# Altium PCB Trigger.PcbDoc (part 1 of 3)
Units mil, origin at the board's own origin, x right, y up, seen from the top; angles counter-clockwise.
Board outline 9937 x 6299 mil, 4 copper layers (TopLayer, MidLayer1, MidLayer2, BottomLayer); 197 components, 279 nets, 1978 pads, 340 vias.
Unrouted connection lines stored in the file: 59.
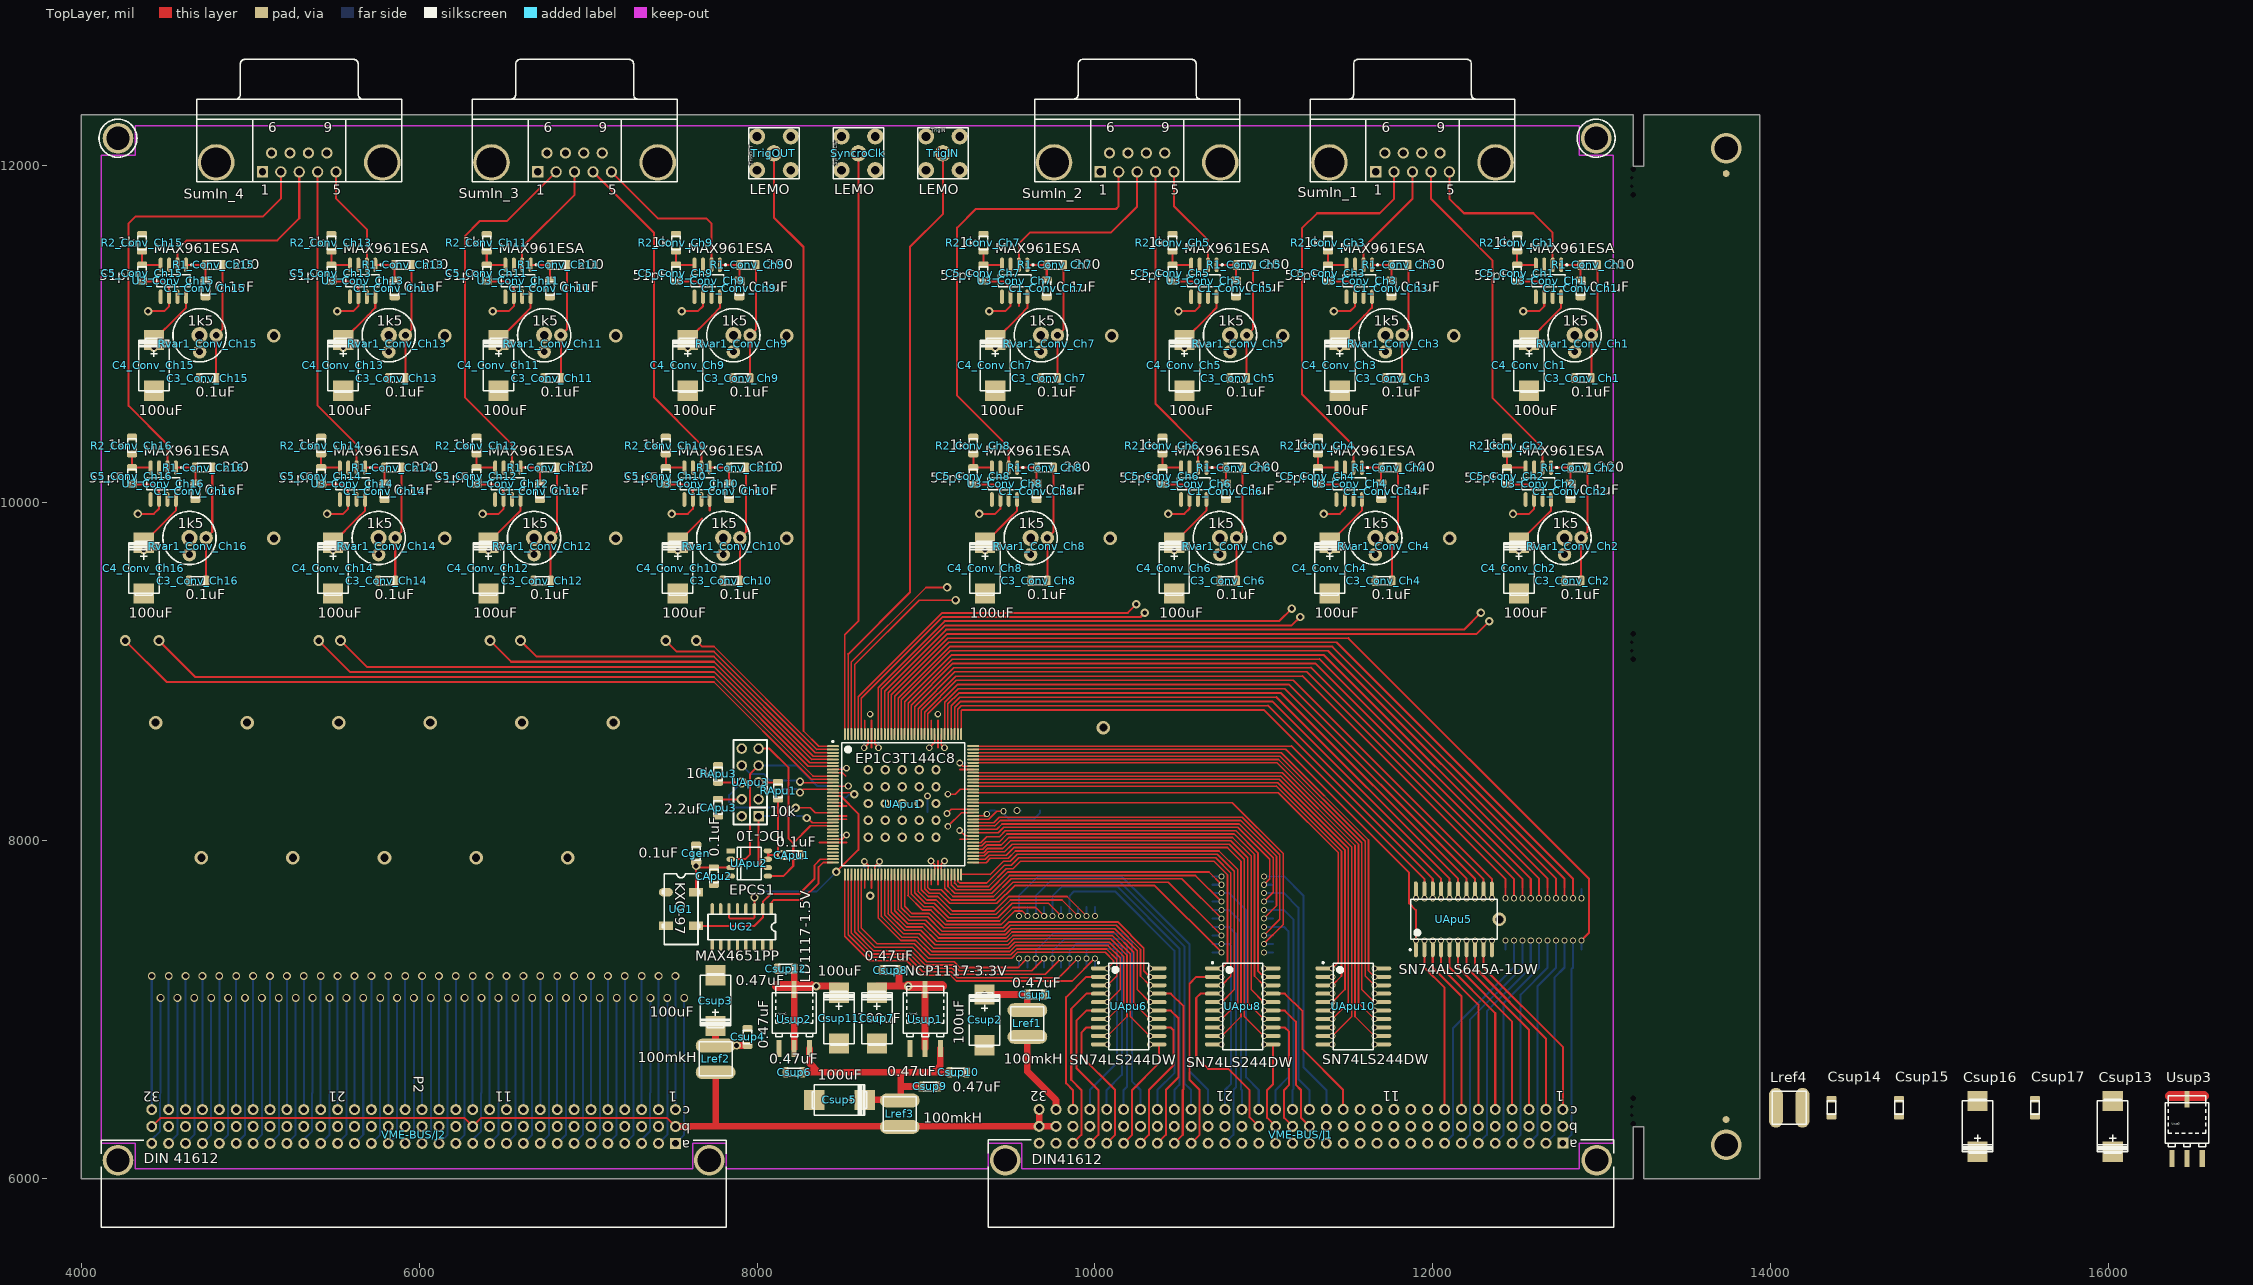
[diagram p0: TopLayer view]
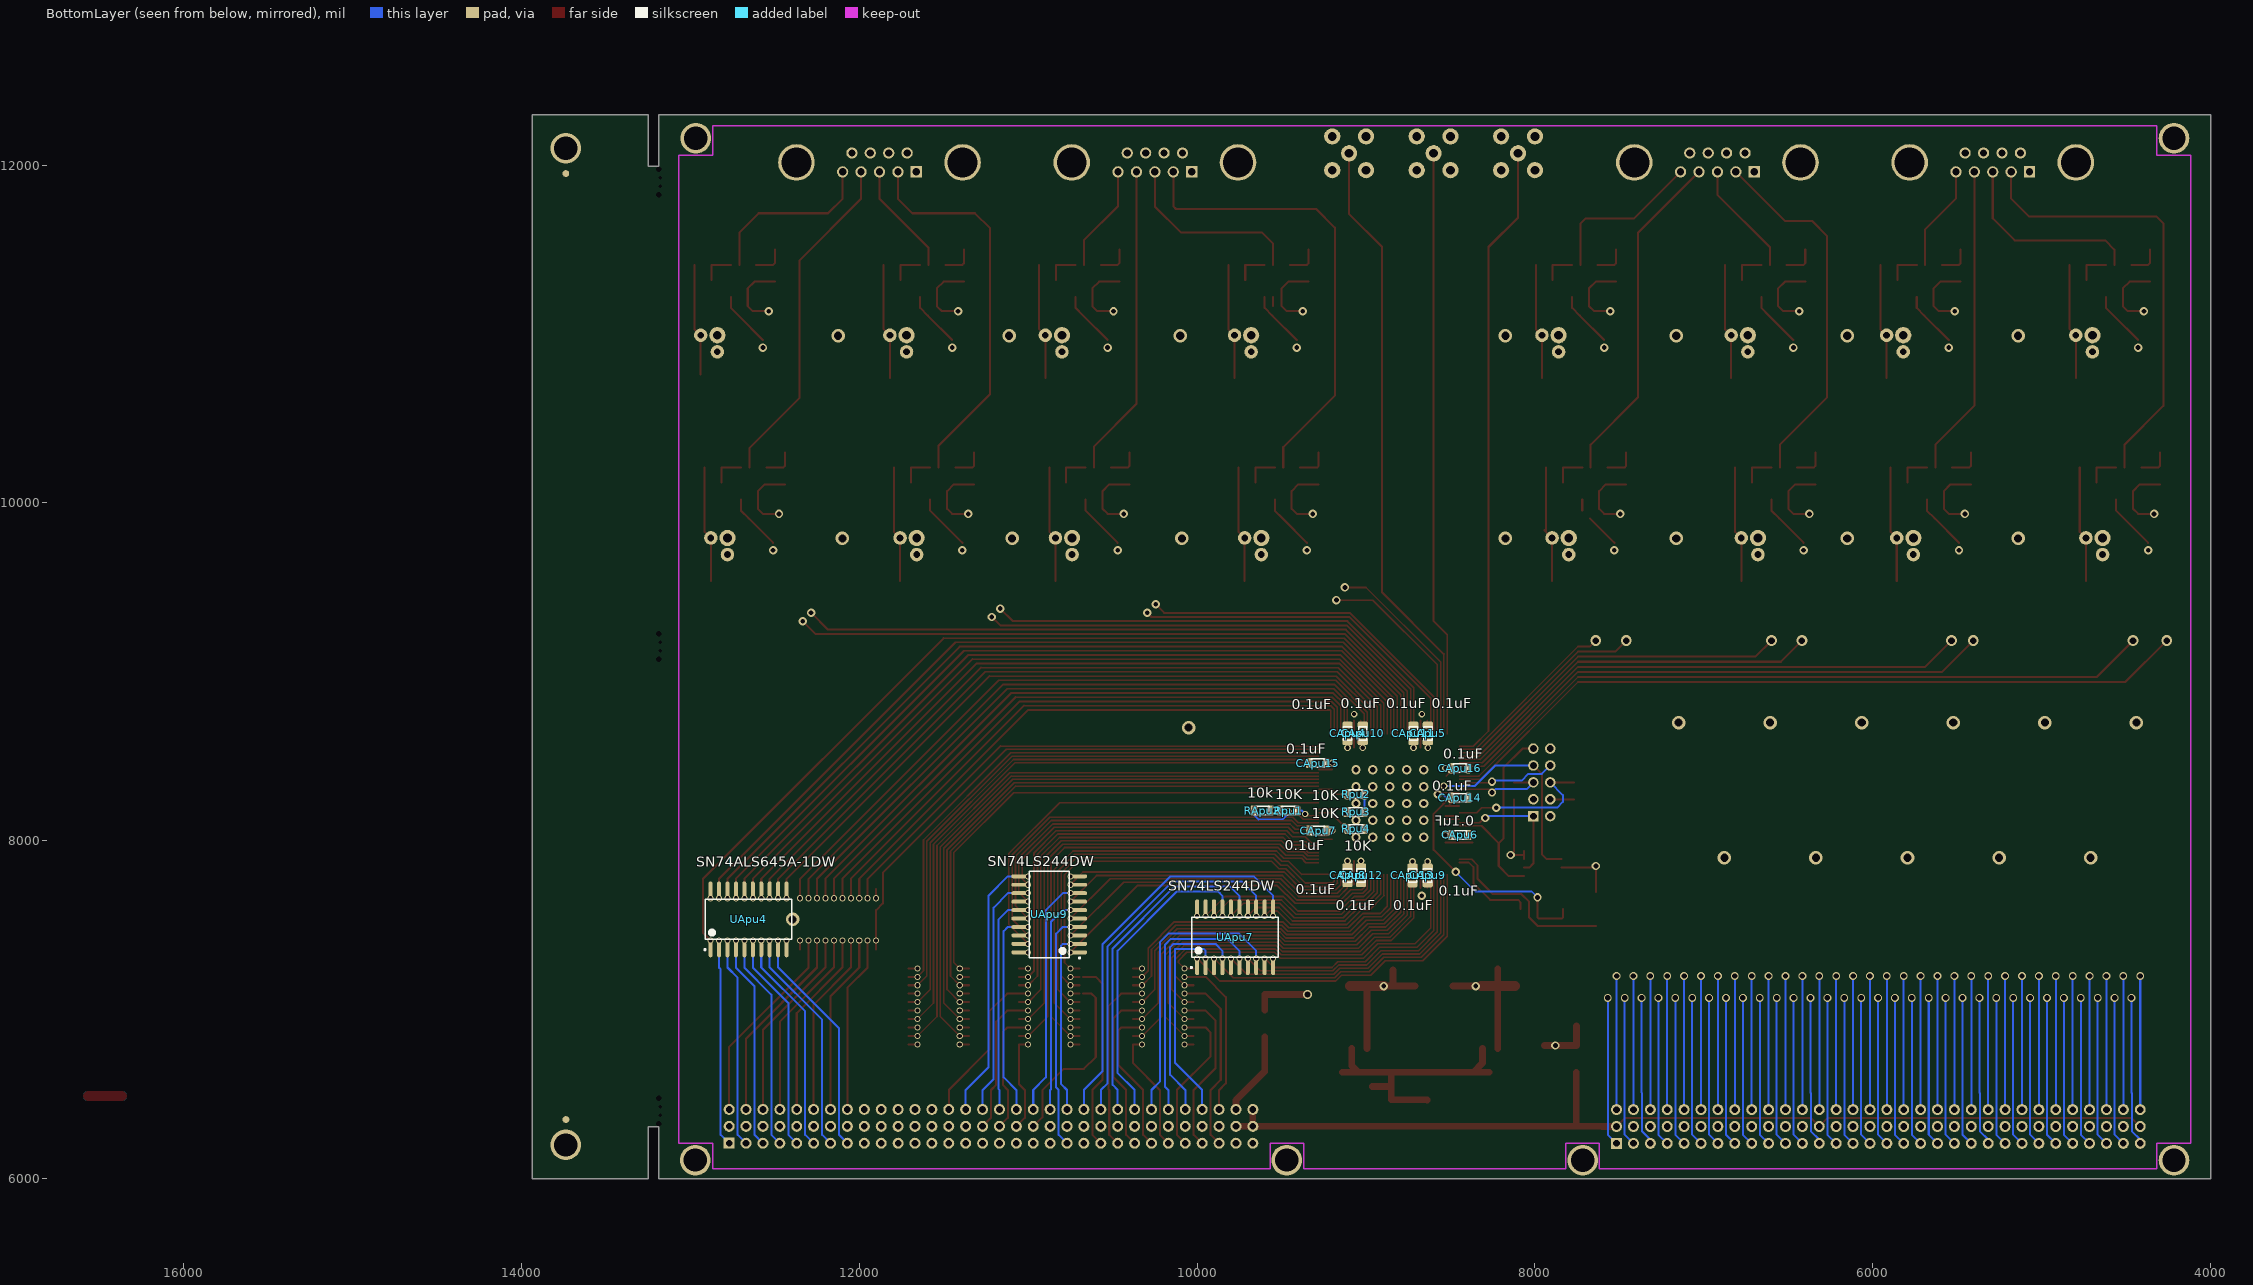
[diagram p1: BottomLayer view, seen from below]
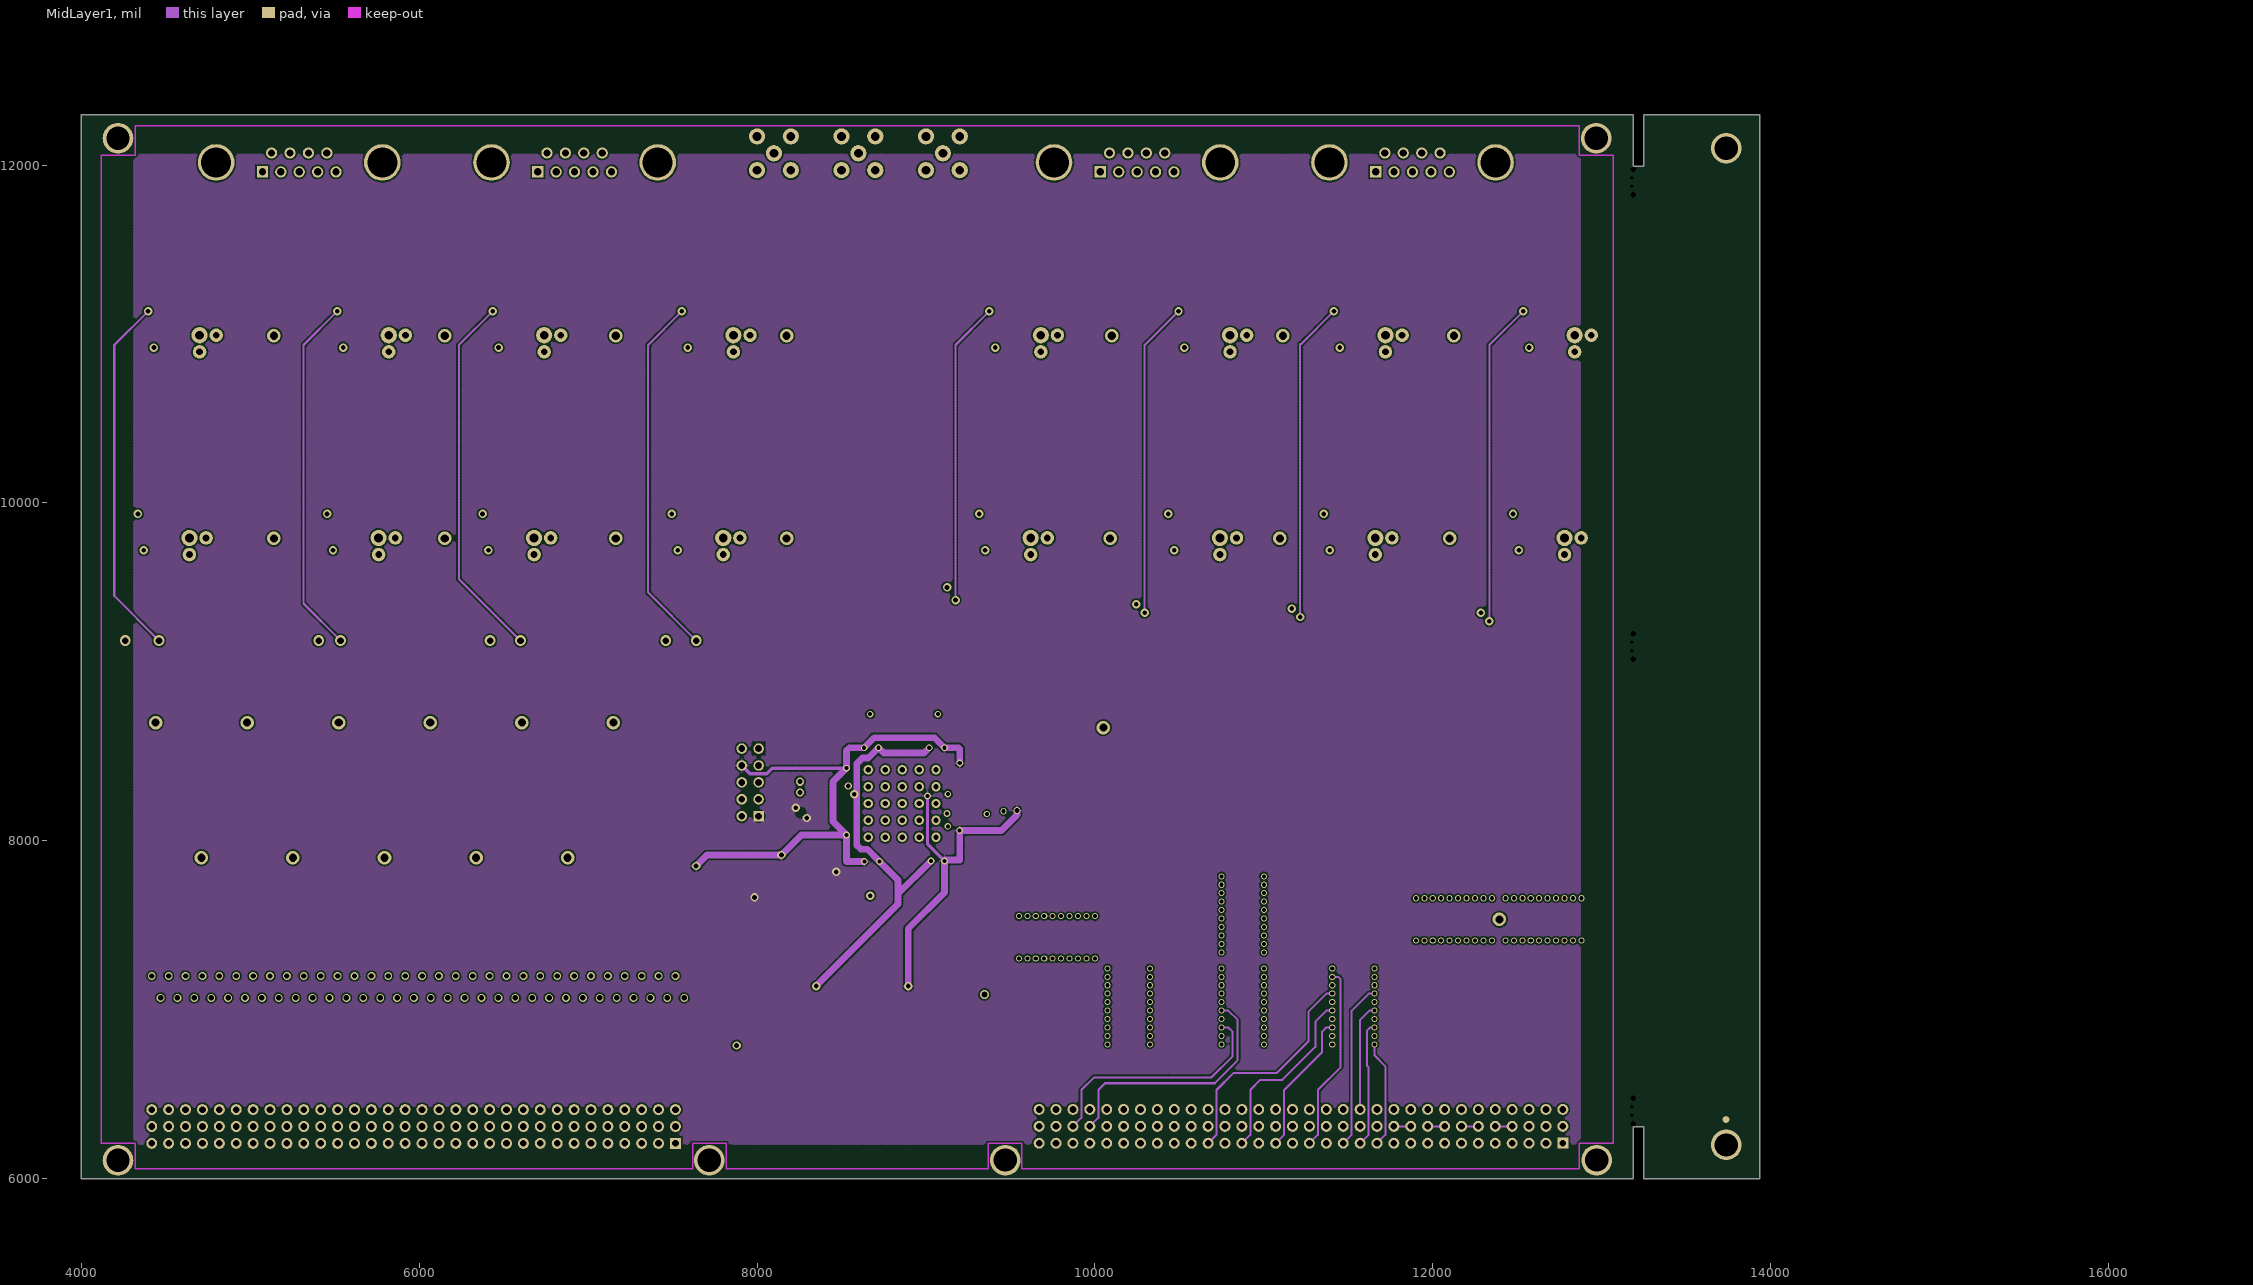
[diagram p2: MidLayer1]
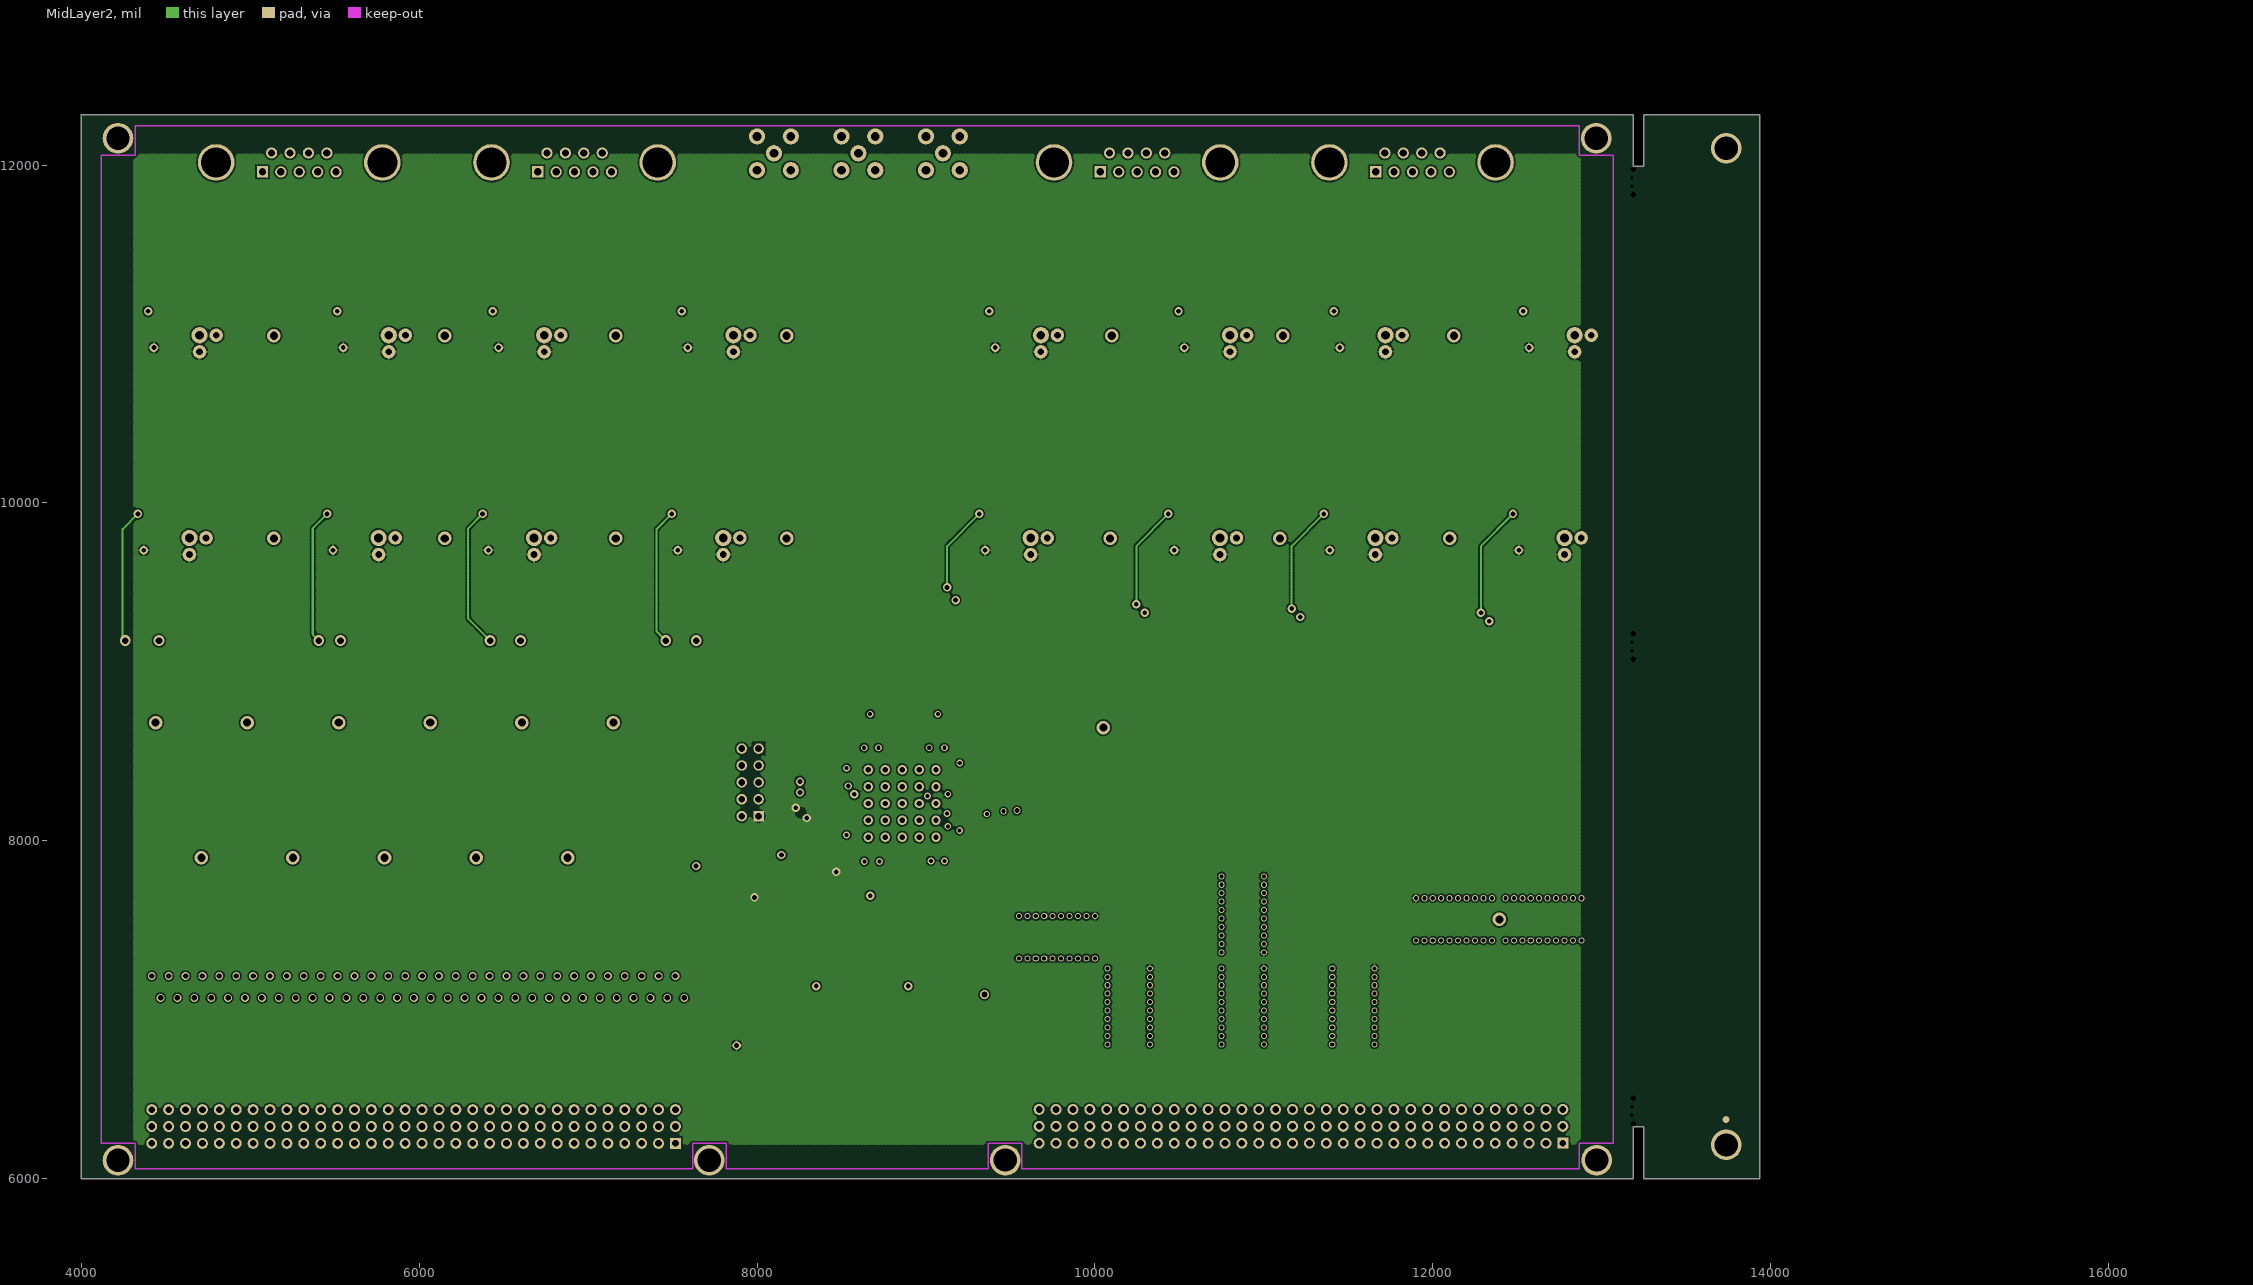
[diagram p3: MidLayer2]

## Layer stack, top to bottom
TopLayer: signal copper 1.4
Dielectric: core 12.6, FR-4, Dk 4.8
MidLayer1: signal copper 1.4
Dielectric: prepreg 12.6, FR-4, Dk 4.8
MidLayer2: signal copper 1.4
Dielectric: core 12.6, FR-4, Dk 4.8
BottomLayer: signal copper 1.4

## Board outline
4000,6000 13187,6000 13187,6307 13249,6307 13249,6000 13937,6000 13937,12299 13249,12299 13249,11993 13187,11993 13187,12299 4000,12299

## Design rules (kind name [scope] priority, off if disabled: settings)
Clearance [All] p1: gap=10
FabricationTestPointUsage TestPointUsage [All] p1: valid=0 allowmultiple=FALSE
FabricationTestpoint Testpoint [All] p1: side=3 testpointundercomponent=TRUE minsize=40 maxsize=100 preferedsize=60 minholesize=20 maxholesize=40 preferedholesize=32 testpointgrid=1 allowsidetop=TRUE allowsidebottom=TRUE usegrid=TRUE gridtolerance=0.01
PlaneClearance [All] p1: clearance=10
PolygonConnect [All] p1: connectstyle=Relief reliefconductorwidth=10 reliefentries=4 polygonreliefangle="90 Angle"
RoomDefinition Processing [InComponentClass('Processing')] p1: confinementstyle=ConfineIn formatcopy=TRUE lockcomponents=FALSE outline 3910,2715 4750,2715 4750,3570 3910,3570
RoomDefinition Conv_Ch16 [InComponentClass('Conv_Ch16')] p2: confinementstyle=ConfineIn formatcopy=TRUE lockcomponents=FALSE outline 5310,2715 5310,3905 4750,3905 4750,2715
RoomDefinition Conv_Ch15 [InComponentClass('Conv_Ch15')] p3: confinementstyle=ConfineIn formatcopy=TRUE lockcomponents=FALSE outline 5870,3905 5870,5095 5310,5095 5310,3905
RoomDefinition Conv_Ch14 [InComponentClass('Conv_Ch14')] p4: confinementstyle=ConfineIn formatcopy=TRUE lockcomponents=FALSE outline 6430,2715 6430,3905 5870,3905 5870,2715
RoomDefinition Conv_Ch13 [InComponentClass('Conv_Ch13')] p5: confinementstyle=ConfineIn formatcopy=TRUE lockcomponents=FALSE outline 6990,3905 6990,5095 6430,5095 6430,3905
RoomDefinition Conv_Ch12 [InComponentClass('Conv_Ch12')] p6: confinementstyle=ConfineIn formatcopy=TRUE lockcomponents=FALSE outline 7550,2715 7550,3905 6990,3905 6990,2715
RoomDefinition Conv_Ch11 [InComponentClass('Conv_Ch11')] p7: confinementstyle=ConfineIn formatcopy=TRUE lockcomponents=FALSE outline 8110,3905 8110,5095 7550,5095 7550,3905
RoomDefinition Conv_Ch10 [InComponentClass('Conv_Ch10')] p8: confinementstyle=ConfineIn formatcopy=TRUE lockcomponents=FALSE outline 8670,2715 8670,3905 8110,3905 8110,2715
RoomDefinition Conv_Ch9 [InComponentClass('Conv_Ch9')] p9: confinementstyle=ConfineIn formatcopy=TRUE lockcomponents=FALSE outline 9230,3905 9230,5095 8670,5095 8670,3905
RoomDefinition Conv_Ch8 [InComponentClass('Conv_Ch8')] p10: confinementstyle=ConfineIn formatcopy=TRUE lockcomponents=FALSE outline 9790,2715 9790,3905 9230,3905 9230,2715
RoomDefinition Conv_Ch7 [InComponentClass('Conv_Ch7')] p11: confinementstyle=ConfineIn formatcopy=TRUE lockcomponents=FALSE outline 10350,3905 10350,5095 9790,5095 9790,3905
RoomDefinition Conv_Ch6 [InComponentClass('Conv_Ch6')] p12: confinementstyle=ConfineIn formatcopy=TRUE lockcomponents=FALSE outline 10910,2715 10910,3905 10350,3905 10350,2715
RoomDefinition Conv_Ch5 [InComponentClass('Conv_Ch5')] p13: confinementstyle=ConfineIn formatcopy=TRUE lockcomponents=FALSE outline 11470,3905 11470,5095 10910,5095 10910,3905
RoomDefinition Conv_Ch4 [InComponentClass('Conv_Ch4')] p14: confinementstyle=ConfineIn formatcopy=TRUE lockcomponents=FALSE outline 12030,2715 12030,3905 11470,3905 11470,2715
RoomDefinition Conv_Ch3 [InComponentClass('Conv_Ch3')] p15: confinementstyle=ConfineIn formatcopy=TRUE lockcomponents=FALSE outline 12590,3905 12590,5095 12030,5095 12030,3905
RoomDefinition Conv_Ch2 [InComponentClass('Conv_Ch2')] p16: confinementstyle=ConfineIn formatcopy=TRUE lockcomponents=FALSE outline 13150,2715 13150,3905 12590,3905 12590,2715
RoomDefinition Conv_Ch1 [InComponentClass('Conv_Ch1')] p17: confinementstyle=ConfineIn formatcopy=TRUE lockcomponents=FALSE outline 13710,3905 13710,5095 13150,5095 13150,3905
RoomDefinition In-Out [InComponentClass('In-Out')] p18: confinementstyle=ConfineIn formatcopy=TRUE lockcomponents=FALSE outline 3910,3570 4755,3570 4755,4130 3910,4130
RoomDefinition Ref_Supply [InComponentClass('Ref_Supply')] p19: confinementstyle=ConfineIn formatcopy=TRUE lockcomponents=FALSE outline 3910,4130 4755,4130 4755,4705 3910,4705
RoutingVias [All] p1: holewidth=28 width=50 viastyle="Through Hole" minholewidth=28 minwidth=50 maxholewidth=28 maxwidth=50
SilkscreenOverComponentPads [All] p1: minsilkscreentomaskgap=10
SolderMaskExpansion SolderMaskExpansion_1 [HasPad('Free-2')] p1: expansion=20
SolderMaskExpansion [HasPad('Free-1')] p2: expansion=20
SolderMaskExpansion SolderMaskExpansion_2 [All] p3: expansion=2
Width [All] p1: maxlimit=60 minlimit=8 preferedwidth=12
24 further rules are at their usual default settings.

## Classes and differential pairs
component class Ref_Supply: Csup1 Csup2 Csup3 Csup4 Csup5 Csup6 Csup7 Csup8 Csup9 Csup10 Csup11 Csup12 Csup13 Csup14 Csup15 Csup16 Csup17 Lref1 Lref2 Lref3 Lref4 Usup1 Usup2 Usup3
channel class Ch_trig: Conv_Ch1 Conv_Ch2 Conv_Ch3 Conv_Ch4 Conv_Ch5 Conv_Ch6 Conv_Ch7 Conv_Ch8 Conv_Ch9 Conv_Ch10 Conv_Ch11 Conv_Ch12 Conv_Ch13 Conv_Ch14 Conv_Ch15 Conv_Ch16
component class In-Out: SumIn_1 SumIn_2 SumIn_3 SumIn_4 SyncroClk TrigIN TrigOUT VME-BUS/J1 VME-BUS/J2
component class Conv_Ch16: C1_Conv_Ch16 C3_Conv_Ch16 C4_Conv_Ch16 C5_Conv_Ch16 R1_Conv_Ch16 R2_Conv_Ch16 Rvar1_Conv_Ch16 U3_Conv_Ch16
component class Conv_Ch15: C1_Conv_Ch15 C3_Conv_Ch15 C4_Conv_Ch15 C5_Conv_Ch15 R1_Conv_Ch15 R2_Conv_Ch15 Rvar1_Conv_Ch15 U3_Conv_Ch15
component class Conv_Ch14: C1_Conv_Ch14 C3_Conv_Ch14 C4_Conv_Ch14 C5_Conv_Ch14 R1_Conv_Ch14 R2_Conv_Ch14 Rvar1_Conv_Ch14 U3_Conv_Ch14
component class Conv_Ch13: C1_Conv_Ch13 C3_Conv_Ch13 C4_Conv_Ch13 C5_Conv_Ch13 R1_Conv_Ch13 R2_Conv_Ch13 Rvar1_Conv_Ch13 U3_Conv_Ch13
component class Conv_Ch12: C1_Conv_Ch12 C3_Conv_Ch12 C4_Conv_Ch12 C5_Conv_Ch12 R1_Conv_Ch12 R2_Conv_Ch12 Rvar1_Conv_Ch12 U3_Conv_Ch12
component class Conv_Ch11: C1_Conv_Ch11 C3_Conv_Ch11 C4_Conv_Ch11 C5_Conv_Ch11 R1_Conv_Ch11 R2_Conv_Ch11 Rvar1_Conv_Ch11 U3_Conv_Ch11
component class Conv_Ch10: C1_Conv_Ch10 C3_Conv_Ch10 C4_Conv_Ch10 C5_Conv_Ch10 R1_Conv_Ch10 R2_Conv_Ch10 Rvar1_Conv_Ch10 U3_Conv_Ch10
component class Conv_Ch9: C1_Conv_Ch9 C3_Conv_Ch9 C4_Conv_Ch9 C5_Conv_Ch9 R1_Conv_Ch9 R2_Conv_Ch9 Rvar1_Conv_Ch9 U3_Conv_Ch9
component class Conv_Ch8: C1_Conv_Ch8 C3_Conv_Ch8 C4_Conv_Ch8 C5_Conv_Ch8 R1_Conv_Ch8 R2_Conv_Ch8 Rvar1_Conv_Ch8 U3_Conv_Ch8
component class Conv_Ch7: C1_Conv_Ch7 C3_Conv_Ch7 C4_Conv_Ch7 C5_Conv_Ch7 R1_Conv_Ch7 R2_Conv_Ch7 Rvar1_Conv_Ch7 U3_Conv_Ch7
component class Conv_Ch6: C1_Conv_Ch6 C3_Conv_Ch6 C4_Conv_Ch6 C5_Conv_Ch6 R1_Conv_Ch6 R2_Conv_Ch6 Rvar1_Conv_Ch6 U3_Conv_Ch6
component class Conv_Ch5: C1_Conv_Ch5 C3_Conv_Ch5 C4_Conv_Ch5 C5_Conv_Ch5 R1_Conv_Ch5 R2_Conv_Ch5 Rvar1_Conv_Ch5 U3_Conv_Ch5
component class Conv_Ch4: C1_Conv_Ch4 C3_Conv_Ch4 C4_Conv_Ch4 C5_Conv_Ch4 R1_Conv_Ch4 R2_Conv_Ch4 Rvar1_Conv_Ch4 U3_Conv_Ch4
component class Conv_Ch3: C1_Conv_Ch3 C3_Conv_Ch3 C4_Conv_Ch3 C5_Conv_Ch3 R1_Conv_Ch3 R2_Conv_Ch3 Rvar1_Conv_Ch3 U3_Conv_Ch3
component class Conv_Ch2: C1_Conv_Ch2 C3_Conv_Ch2 C4_Conv_Ch2 C5_Conv_Ch2 R1_Conv_Ch2 R2_Conv_Ch2 Rvar1_Conv_Ch2 U3_Conv_Ch2
component class Conv_Ch1: C1_Conv_Ch1 C3_Conv_Ch1 C4_Conv_Ch1 C5_Conv_Ch1 R1_Conv_Ch1 R2_Conv_Ch1 Rvar1_Conv_Ch1 U3_Conv_Ch1
component class Processing: CApu1 CApu2 CApu3 CApu4 CApu5 CApu6 CApu7 CApu8 CApu9 CApu10 CApu11 CApu12 CApu13 CApu14 CApu15 CApu16 Cgen RApu1 RApu2 RApu3 Rpu1 Rpu2 Rpu3 Rpu4 UApu1 UApu2 UApu3 UApu4 UApu5 UApu6 UApu7 UApu8 UApu9 UApu10 UG1 UG2

## Components (designator, comment, footprint, x,y, rotation, side; value= is the part's Value field where it differs from the comment)
C1_Conv_Ch1 "0.1uF" chip0805 12875,11220 r90 top (schematic designator C1)
C1_Conv_Ch2 "0.1uF" chip0805 12815,10020 r90 top (schematic designator C1)
C1_Conv_Ch3 "0.1uF" chip0805 11755,11220 r90 top (schematic designator C1)
C1_Conv_Ch4 "0.1uF" chip0805 11695,10020 r90 top (schematic designator C1)
C1_Conv_Ch5 "0.1uF" chip0805 10835,11220 r90 top (schematic designator C1)
C1_Conv_Ch6 "0.1uF" chip0805 10775,10020 r90 top (schematic designator C1)
C1_Conv_Ch7 "0.1uF" chip0805 9715,11220 r90 top (schematic designator C1)
C1_Conv_Ch8 "0.1uF" chip0805 9655,10020 r90 top (schematic designator C1)
C1_Conv_Ch9 "0.1uF" chip0805 7895,11220 r90 top (schematic designator C1)
C1_Conv_Ch10 "0.1uF" chip0805 7835,10020 r90 top (schematic designator C1)
C1_Conv_Ch11 "0.1uF" chip0805 6775,11220 r90 top (schematic designator C1)
C1_Conv_Ch12 "0.1uF" chip0805 6715,10020 r90 top (schematic designator C1)
C1_Conv_Ch13 "0.1uF" chip0805 5855,11220 r90 top (schematic designator C1)
C1_Conv_Ch14 "0.1uF" chip0805 5795,10020 r90 top (schematic designator C1)
C1_Conv_Ch15 "0.1uF" chip0805 4735,11220 r90 top (schematic designator C1)
C1_Conv_Ch16 "0.1uF" chip0805 4675,10020 r90 top (schematic designator C1)
C3_Conv_Ch1 "0.1uF" chip0805 12838.43,10739.45 r0 top (schematic designator C3)
C3_Conv_Ch2 "0.1uF" chip0805 12778.43,9539.45 r0 top (schematic designator C3)
C3_Conv_Ch3 "0.1uF" chip0805 11718.43,10739.45 r0 top (schematic designator C3)
C3_Conv_Ch4 "0.1uF" chip0805 11658.43,9539.45 r0 top (schematic designator C3)
C3_Conv_Ch5 "0.1uF" chip0805 10798.43,10739.45 r0 top (schematic designator C3)
C3_Conv_Ch6 "0.1uF" chip0805 10738.43,9539.45 r0 top (schematic designator C3)
C3_Conv_Ch7 "0.1uF" chip0805 9678.43,10739.45 r0 top (schematic designator C3)
C3_Conv_Ch8 "0.1uF" chip0805 9618.43,9539.45 r0 top (schematic designator C3)
C3_Conv_Ch9 "0.1uF" chip0805 7858.43,10739.45 r0 top (schematic designator C3)
C3_Conv_Ch10 "0.1uF" chip0805 7798.43,9539.45 r0 top (schematic designator C3)
C3_Conv_Ch11 "0.1uF" chip0805 6738.43,10739.45 r0 top (schematic designator C3)
C3_Conv_Ch12 "0.1uF" chip0805 6678.43,9539.45 r0 top (schematic designator C3)
C3_Conv_Ch13 "0.1uF" chip0805 5818.43,10739.45 r0 top (schematic designator C3)
C3_Conv_Ch14 "0.1uF" chip0805 5758.43,9539.45 r0 top (schematic designator C3)
C3_Conv_Ch15 "0.1uF" chip0805 4698.43,10739.45 r0 top (schematic designator C3)
C3_Conv_Ch16 "0.1uF" chip0805 4638.43,9539.45 r0 top (schematic designator C3)
C4_Conv_Ch1 "100uF" CEL-SMD300 12570,10964.49 r270 top (schematic designator C4)
C4_Conv_Ch2 "100uF" CEL-SMD300 12510,9764.49 r270 top (schematic designator C4)
C4_Conv_Ch3 "100uF" CEL-SMD300 11450,10964.49 r270 top (schematic designator C4)
C4_Conv_Ch4 "100uF" CEL-SMD300 11390,9764.49 r270 top (schematic designator C4)
C4_Conv_Ch5 "100uF" CEL-SMD300 10530,10964.49 r270 top (schematic designator C4)
C4_Conv_Ch6 "100uF" CEL-SMD300 10470,9764.49 r270 top (schematic designator C4)
C4_Conv_Ch7 "100uF" CEL-SMD300 9410,10964.49 r270 top (schematic designator C4)
C4_Conv_Ch8 "100uF" CEL-SMD300 9350,9764.49 r270 top (schematic designator C4)
C4_Conv_Ch9 "100uF" CEL-SMD300 7590,10964.49 r270 top (schematic designator C4)
C4_Conv_Ch10 "100uF" CEL-SMD300 7530,9764.49 r270 top (schematic designator C4)
C4_Conv_Ch11 "100uF" CEL-SMD300 6470,10964.49 r270 top (schematic designator C4)
C4_Conv_Ch12 "100uF" CEL-SMD300 6410,9764.49 r270 top (schematic designator C4)
C4_Conv_Ch13 "100uF" CEL-SMD300 5550,10964.49 r270 top (schematic designator C4)
C4_Conv_Ch14 "100uF" CEL-SMD300 5490,9764.49 r270 top (schematic designator C4)
C4_Conv_Ch15 "100uF" CEL-SMD300 4430,10964.49 r270 top (schematic designator C4)
C4_Conv_Ch16 "100uF" CEL-SMD300 4370,9764.49 r270 top (schematic designator C4)
C5_Conv_Ch1 "51pF" chip0805 12500,11409.49 r270 top (schematic designator C5)
C5_Conv_Ch2 "51pF" chip0805 12440,10209.49 r270 top (schematic designator C5)
C5_Conv_Ch3 "51pF" chip0805 11380,11409.49 r270 top (schematic designator C5)
C5_Conv_Ch4 "51pF" chip0805 11320,10209.49 r270 top (schematic designator C5)
C5_Conv_Ch5 "51pF" chip0805 10460,11409.49 r270 top (schematic designator C5)
C5_Conv_Ch6 "51pF" chip0805 10400,10209.49 r270 top (schematic designator C5)
C5_Conv_Ch7 "51pF" chip0805 9340,11409.49 r270 top (schematic designator C5)
C5_Conv_Ch8 "51pF" chip0805 9280,10209.49 r270 top (schematic designator C5)
C5_Conv_Ch9 "51pF" chip0805 7520,11409.49 r270 top (schematic designator C5)
C5_Conv_Ch10 "51pF" chip0805 7460,10209.49 r270 top (schematic designator C5)
C5_Conv_Ch11 "51pF" chip0805 6400,11409.49 r270 top (schematic designator C5)
C5_Conv_Ch12 "51pF" chip0805 6340,10209.49 r270 top (schematic designator C5)
C5_Conv_Ch13 "51pF" chip0805 5480,11409.49 r270 top (schematic designator C5)
C5_Conv_Ch14 "51pF" chip0805 5420,10209.49 r270 top (schematic designator C5)
C5_Conv_Ch15 "51pF" chip0805 4360,11409.49 r270 top (schematic designator C5)
C5_Conv_Ch16 "51pF" chip0805 4300,10209.49 r270 top (schematic designator C5)
CApu1 "0.1uF" chip0805 8254.29,7916.02 r180 top
CApu2 "0.1uF" chip0805 7744.29,7741.02 r90 top
CApu3 "2.2uF" chip0805 7769.29,8246.02 r270 top
CApu4 "0.1uF" chip0805 9109.29,8686.02 r270 bottom
CApu5 "0.1uF" chip0805 8634.29,8686.02 r270 bottom
CApu6 "0.1uF" chip0805 8395,8035 r0 bottom
CApu7 "0.1uF" chip0805 9334.29,8061.02 r180 bottom
CApu8 "0.1uF" chip0805 9109.29,7746.02 r90 bottom
CApu9 "0.1uF" chip0805 8635,7745 r90 bottom
CApu10 "0.1uF" chip0805 9019.29,8686.02 r270 bottom
CApu11 "0.1uF" chip0805 8719.29,8686.02 r270 bottom
CApu12 "0.1uF" chip0805 9029.29,7746.02 r90 bottom
CApu13 "0.1uF" chip0805 8725,7745 r90 bottom
CApu14 "0.1uF" chip0805 8395,8255 r0 bottom
CApu15 "0.1uF" chip0805 9335,8460 r180 bottom
CApu16 "0.1uF" chip0805 8395,8430 r0 bottom
Cgen "0.1uF" chip0805 7640,7975 r270 top
Csup1 "0.47uF" chip0805 9600,7090.26 r0 top
Csup2 "100uF" CEL-SMD300 9346.52,7090.26 r270 top
Csup3 "100uF" CEL-SMD300 7753.93,6903.93 r90 top
Csup4 "0.47uF" chip0805 7943.93,6788.93 r90 top
Csup5 "100uF" CEL-SMD300 8638,6466.07 r180 top
Csup6 "0.47uF" chip0805 8270,6630 r180 top
Csup7 "100uF" CEL-SMD300 8710,7100 r270 top
Csup8 "0.47uF" chip0805 8840,7235 r180 top
Csup9 "0.47uF" chip0805 8973,6546.07 r0 top
Csup10 "0.47uF" chip0805 9140,6630 r0 top
Csup11 "100uF" CEL-SMD300 8485,7100 r270 top
Csup12 "0.47uF" chip0805 8220,7243 r180 top
Csup13 "100uF" CEL-SMD300 16025,6160 r90 top
Csup14 "0.47uF" chip0805 14360,6370 r90 top
Csup15 "0.47uF" chip0805 14760,6370 r90 top
Csup16 "100uF" CEL-SMD300 15225,6160 r90 top
Csup17 "0.47uF" chip0805 15565,6370 r90 top
Lref1 "100mkH" SDR0604 9600,6918.74 r90 top
Lref2 "100mkH" SDR0604 7755,6708.74 r90 top
Lref3 "100mkH" SDR0604 8845,6385 r90 top
Lref4 "100mkH" SDR0604 14110,6420 r0 top
R1_Conv_Ch1 "200" chip0805 12975,11409.49 r180 top (schematic designator R1)
R1_Conv_Ch2 "200" chip0805 12915,10209.49 r180 top (schematic designator R1)
R1_Conv_Ch3 "200" chip0805 11855,11409.49 r180 top (schematic designator R1)
R1_Conv_Ch4 "200" chip0805 11795,10209.49 r180 top (schematic designator R1)
R1_Conv_Ch5 "200" chip0805 10935,11409.49 r180 top (schematic designator R1)
R1_Conv_Ch6 "200" chip0805 10875,10209.49 r180 top (schematic designator R1)
R1_Conv_Ch7 "200" chip0805 9815,11409.49 r180 top (schematic designator R1)
R1_Conv_Ch8 "200" chip0805 9755,10209.49 r180 top (schematic designator R1)
R1_Conv_Ch9 "200" chip0805 7995,11409.49 r180 top (schematic designator R1)
R1_Conv_Ch10 "200" chip0805 7935,10209.49 r180 top (schematic designator R1)
R1_Conv_Ch11 "200" chip0805 6875,11409.49 r180 top (schematic designator R1)
R1_Conv_Ch12 "200" chip0805 6815,10209.49 r180 top (schematic designator R1)
R1_Conv_Ch13 "200" chip0805 5955,11409.49 r180 top (schematic designator R1)
R1_Conv_Ch14 "200" chip0805 5895,10209.49 r180 top (schematic designator R1)
R1_Conv_Ch15 "200" chip0805 4835,11409.49 r180 top (schematic designator R1)
R1_Conv_Ch16 "200" chip0805 4775,10209.49 r180 top (schematic designator R1)
R2_Conv_Ch1 "1k" chip0805 12500,11490 r90 top (schematic designator R2)
R2_Conv_Ch2 "1k" chip0805 12440,10290 r90 top (schematic designator R2)
R2_Conv_Ch3 "1k" chip0805 11380,11490 r90 top (schematic designator R2)
R2_Conv_Ch4 "1k" chip0805 11320,10290 r90 top (schematic designator R2)
R2_Conv_Ch5 "1k" chip0805 10460,11490 r90 top (schematic designator R2)
R2_Conv_Ch6 "1k" chip0805 10400,10290 r90 top (schematic designator R2)
R2_Conv_Ch7 "1k" chip0805 9340,11490 r90 top (schematic designator R2)
R2_Conv_Ch8 "1k" chip0805 9280,10290 r90 top (schematic designator R2)
R2_Conv_Ch9 "1k" chip0805 7520,11490 r90 top (schematic designator R2)
R2_Conv_Ch10 "1k" chip0805 7460,10290 r90 top (schematic designator R2)
R2_Conv_Ch11 "1k" chip0805 6400,11490 r90 top (schematic designator R2)
R2_Conv_Ch12 "1k" chip0805 6340,10290 r90 top (schematic designator R2)
R2_Conv_Ch13 "1k" chip0805 5480,11490 r90 top (schematic designator R2)
R2_Conv_Ch14 "1k" chip0805 5420,10290 r90 top (schematic designator R2)
R2_Conv_Ch15 "1k" chip0805 4360,11490 r90 top (schematic designator R2)
R2_Conv_Ch16 "1k" chip0805 4300,10290 r90 top (schematic designator R2)
RApu1 "10k" chip0805 8124.29,8246.02 r90 top
RApu2 "10k" chip0805 9563.9,8178.9 r0 bottom
RApu3 "10k" chip0805 7769.29,8346.02 r90 top
Rpu1 "10K" chip0805 9508.9,8178.9 r180 bottom
Rpu2 "10K" chip0805 9009.29,8276.02 r0 bottom
Rpu3 "10K" chip0805 9009.29,8171.02 r0 bottom
Rpu4 "10K" chip0805 9009.29,8071.02 r0 bottom
Rvar1_Conv_Ch1 "1k5" RVAR4 12840,10894.49 r90 top (schematic designator Rvar1)
Rvar1_Conv_Ch2 "1k5" RVAR4 12780,9694.49 r90 top (schematic designator Rvar1)
Rvar1_Conv_Ch3 "1k5" RVAR4 11720,10894.49 r90 top (schematic designator Rvar1)
Rvar1_Conv_Ch4 "1k5" RVAR4 11660,9694.49 r90 top (schematic designator Rvar1)
Rvar1_Conv_Ch5 "1k5" RVAR4 10800,10894.49 r90 top (schematic designator Rvar1)
Rvar1_Conv_Ch6 "1k5" RVAR4 10740,9694.49 r90 top (schematic designator Rvar1)
Rvar1_Conv_Ch7 "1k5" RVAR4 9680,10894.49 r90 top (schematic designator Rvar1)
Rvar1_Conv_Ch8 "1k5" RVAR4 9620,9694.49 r90 top (schematic designator Rvar1)
Rvar1_Conv_Ch9 "1k5" RVAR4 7860,10894.49 r90 top (schematic designator Rvar1)
Rvar1_Conv_Ch10 "1k5" RVAR4 7800,9694.49 r90 top (schematic designator Rvar1)
Rvar1_Conv_Ch11 "1k5" RVAR4 6740,10894.49 r90 top (schematic designator Rvar1)
Rvar1_Conv_Ch12 "1k5" RVAR4 6680,9694.49 r90 top (schematic designator Rvar1)
Rvar1_Conv_Ch13 "1k5" RVAR4 5820,10894.49 r90 top (schematic designator Rvar1)
Rvar1_Conv_Ch14 "1k5" RVAR4 5760,9694.49 r90 top (schematic designator Rvar1)
Rvar1_Conv_Ch15 "1k5" RVAR4 4700,10894.49 r90 top (schematic designator Rvar1)
Rvar1_Conv_Ch16 "1k5" RVAR4 4640,9694.49 r90 top (schematic designator Rvar1)
SumIn_1 "DRB-9-M" DSUB1.385-2H9 11880,12390 r0 top
SumIn_2 "DRB-9-M" DSUB1.385-2H9 10250,12390 r0 top
SumIn_3 "DRB-9-M" DSUB1.385-2H9 6920,12390 r0 top
SumIn_4 "DRB-9-M" DSUB1.385-2H9 5290,12390 r0 top
SyncroClk "LEMO" LEMO 8600,12070 r90 top
TrigIN "LEMO" LEMO 9100,12070 r0 top
TrigOUT "LEMO" LEMO 8100,12070 r90 top
U3_Conv_Ch1 "MAX961ESA" NSO8_N 12685,11315 r270 top (schematic designator U3)
U3_Conv_Ch2 "MAX961ESA" NSO8_N 12625,10115 r270 top (schematic designator U3)
U3_Conv_Ch3 "MAX961ESA" NSO8_N 11565,11315 r270 top (schematic designator U3)
U3_Conv_Ch4 "MAX961ESA" NSO8_N 11505,10115 r270 top (schematic designator U3)
U3_Conv_Ch5 "MAX961ESA" NSO8_N 10645,11315 r270 top (schematic designator U3)
U3_Conv_Ch6 "MAX961ESA" NSO8_N 10585,10115 r270 top (schematic designator U3)
U3_Conv_Ch7 "MAX961ESA" NSO8_N 9525,11315 r270 top (schematic designator U3)
U3_Conv_Ch8 "MAX961ESA" NSO8_N 9465,10115 r270 top (schematic designator U3)
U3_Conv_Ch9 "MAX961ESA" NSO8_N 7705,11315 r270 top (schematic designator U3)
U3_Conv_Ch10 "MAX961ESA" NSO8_N 7645,10115 r270 top (schematic designator U3)
U3_Conv_Ch11 "MAX961ESA" NSO8_N 6585,11315 r270 top (schematic designator U3)
U3_Conv_Ch12 "MAX961ESA" NSO8_N 6525,10115 r270 top (schematic designator U3)
U3_Conv_Ch13 "MAX961ESA" NSO8_N 5665,11315 r270 top (schematic designator U3)
U3_Conv_Ch14 "MAX961ESA" NSO8_N 5605,10115 r270 top (schematic designator U3)
U3_Conv_Ch15 "MAX961ESA" NSO8_N 4545,11315 r270 top (schematic designator U3)
U3_Conv_Ch16 "MAX961ESA" NSO8_N 4485,10115 r270 top (schematic designator U3)
UApu1 "EP1C3T144C8" TQFP144_N 8864.29,8216.02 r0 top
UApu2 "EPCS1" 8SO200 7844.29,7941.02 r270 top
UApu3 "IDC-10" IDC10 8009.29,8146.02 r90 top
UApu4 "SN74ALS645A-1DW" DW020_N 12655,7535 r90 bottom
UApu5 "SN74ALS645A-1DW" DW020_N 12125,7535 r90 top
UApu6 "SN74LS244DW" DW020_N 10200,7020 r0 top
UApu7 "SN74LS244DW" DW020_N 9775,7429.13 r90 bottom
UApu8 "SN74LS244DW" DW020_N 10875,7020 r0 top
UApu9 "SN74LS244DW" DW020_N 10875,7565 r0 bottom
UApu10 "SN74LS244DW" DW020_N 11530,7020 r0 top
UG1 "KXO-97" SG-636 7460,7696.02 r0 top
UG2 "MAX4651PP" 16SOIC150 8084.29,7596.02 r270 top
Usup1 "NCP1117-3.3V" TO-252#1 8995,6770 r0 top
Usup2 "LD1117-1.5V" TO-252#2 8220,6770 r0 top
Usup3 "NCP1117-3.3V" TO-252#2 16465,6120 r0 top
VME-BUS/J1 "DIN41612" EURO2.54-2H96 11220,5712.36 r180 top
VME-BUS/J2 "DIN 41612" EURO2.54-2H96 5967,5711.36 r180 top

## Footprints (in the part's own frame and the unit in brackets; to place one, negate y for a bottom-side part, rotate by r counter-clockwise, add the part's x,y. Pads: shape width x height; smd on the part's side, far side on the other; paste and mask are expansions set on the pad)
8SO200 [mil]
  rect 30x50 smd: 1(0,0)
  oval 30x50 smd: 2(50,0) 3(100,0) 4(150,0) 5(150,220) 6(100,220) 7(50,220) 8(0,220)
  silkscreen extent -20,40 170,180
16SOIC150 [mil]
  rect 70x20 smd: 1(0,0)
  oval 70x20 smd: 2(0,-50) 3(0,-100) 4(0,-150) 5(0,-200) 6(0,-250) 7(0,-300) 8(0,-350) 9(212,-350) 10(212,-300) 11(212,-250) 12(212,-200) 13(212,-150) 14(212,-100) 15(212,-50) 16(212,0)
  silkscreen extent 31,-375 181,25
CEL-SMD300 [mil]
  rect 120x120 smd: +(0,0) -(300,0)
  silkscreen extent -10,-90 310,90
chip0805 [mil]
  oval 20x60 smd: 1(-10,0) 1(0,0) 1(10,0) 2(90,0) 2(100,0) 2(110,0)
  oval 40x20 smd: 1(0,20) 1(0,-20) 2(100,-20) 2(100,20)
  silkscreen extent 10,-25 90,25
DSUB1.385-2H9 [mm] "Connector; D Subminiature; 9 Position; Right Angle; Pitch 1.385 mm"
  rect 1.69x1.69 hole 1.09: 1(-5.54,-10.92)
  round 1.69 hole 1.09: 2(-2.77,-10.92) 3(0,-10.92) 4(2.77,-10.92) 5(5.54,-10.92) 6(-4.155,-8.08) 7(-1.385,-8.08) 8(1.385,-8.08) 9(4.155,-8.08)
  round 5.5 hole 4.5: 10(-12.495,-9.5) 11(12.495,-9.5)
  silkscreen extent -15.4,-12.4 15.4,6
DW020_N [mm] "SOIC, 20-Leads, Body 12.8x7.5mm, Pitch 1.27mm, IPC Medium Density"
  oval 2.3x0.6 smd: 1(-4.55,5.715) 2(-4.55,4.445) 3(-4.55,3.175) 4(-4.55,1.905) 5(-4.55,0.635) 6(-4.55,-0.635) 7(-4.55,-1.905) 8(-4.55,-3.175) 9(-4.55,-4.445) 10(-4.55,-5.715) 11(4.55,-5.715) 12(4.55,-4.445) 13(4.55,-3.175) 14(4.55,-1.905) 15(4.55,-0.635) 16(4.55,0.635) 17(4.55,1.905) 18(4.55,3.175) 19(4.55,4.445) 20(4.55,5.715)
  silkscreen extent -4.67,-6.5 3,6.69, body extent -3.75,-6.4 3.75,6.4, height 2.65
EURO2.54-2H96 [mm] "Connector; DIN 41612, Type C, Thru-Hole; Rows a+b+c, 96 Position; Right Angle"
  round 4.6 hole 3.5: 33(-44.45,-10.1) 34(44.45,-10.1)
  rect 1.65x1.65 hole 1: A1(-39.37,-12.64)
  round 1.65 hole 1: A2(-36.83,-12.64) A3(-34.29,-12.64) A4(-31.75,-12.64) A5(-29.21,-12.64) A6(-26.67,-12.64) A7(-24.13,-12.64) A8(-21.59,-12.64) A9(-19.05,-12.64) A10(-16.51,-12.64) A11(-13.97,-12.64) A12(-11.43,-12.64) A13(-8.89,-12.64) A14(-6.35,-12.64) A15(-3.81,-12.64) A16(-1.27,-12.64) A17(1.27,-12.64) A18(3.81,-12.64) A19(6.35,-12.64) A20(8.89,-12.64) A21(11.43,-12.64) A22(13.97,-12.64) A23(16.51,-12.64) A24(19.05,-12.64) A25(21.59,-12.64) A26(24.13,-12.64) A27(26.67,-12.64) A28(29.21,-12.64) A29(31.75,-12.64) A30(34.29,-12.64) A31(36.83,-12.64) A32(39.37,-12.64) B1(-39.37,-15.18) B2(-36.83,-15.18) B3(-34.29,-15.18) B4(-31.75,-15.18) B5(-29.21,-15.18) B6(-26.67,-15.18) B7(-24.13,-15.18) B8(-21.59,-15.18) B9(-19.05,-15.18) B10(-16.51,-15.18) B11(-13.97,-15.18) B12(-11.43,-15.18) B13(-8.89,-15.18) B14(-6.35,-15.18) B15(-3.81,-15.18) B16(-1.27,-15.18) B17(1.27,-15.18) B18(3.81,-15.18) B19(6.35,-15.18) B20(8.89,-15.18) B21(11.43,-15.18) B22(13.97,-15.18) B23(16.51,-15.18) B24(19.05,-15.18) B25(21.59,-15.18) B26(24.13,-15.18) B27(26.67,-15.18) B28(29.21,-15.18) B29(31.75,-15.18) B30(34.29,-15.18) B31(36.83,-15.18) B32(39.37,-15.18) C1(-39.37,-17.72) C2(-36.83,-17.72) C3(-34.29,-17.72) C4(-31.75,-17.72) C5(-29.21,-17.72) C6(-26.67,-17.72) C7(-24.13,-17.72) C8(-21.59,-17.72) C9(-19.05,-17.72) C10(-16.51,-17.72) C11(-13.97,-17.72) C12(-11.43,-17.72) C13(-8.89,-17.72) C14(-6.35,-17.72) C15(-3.81,-17.72) C16(-1.27,-17.72) C17(1.27,-17.72) C18(3.81,-17.72) C19(6.35,-17.72) C20(8.89,-17.72) C21(11.43,-17.72) C22(13.97,-17.72) C23(16.51,-17.72) C24(19.05,-17.72) C25(21.59,-17.72) C26(24.13,-17.72) C27(26.67,-17.72) C28(29.21,-17.72) C29(31.75,-17.72) C30(34.29,-17.72) C31(36.83,-17.72) C32(39.37,-17.72)
  silkscreen extent -47,-13.14 47,0, body extent -47,-13.14 47,0, height 11.1
IDC10 [mil]
  rect 62x62 hole 40: 1(0,0)
  round 62 hole 40: 2(0,100) 3(100,0) 4(100,100) 5(200,0) 6(200,100) 7(300,0) 8(300,100) 9(400,0) 10(400,100)
  silkscreen extent -50,-50 450,150
LEMO [mil]
  round 96 hole 52: SHIELD(-100,-100) SHIELD(-100,100) SHIELD(100,-100) SHIELD(100,100) WIRE(0,0)
  silkscreen extent -150,-150 150,150
NSO8_N [mm] "SOIC, 8-Leads, Body 4.9x3.9mm, Pitch 1.27mm, IPC Medium Density"
  oval 2.2x0.6 smd: 1(-2.4,1.905) 2(-2.4,0.635) 3(-2.4,-0.635) 4(-2.4,-1.905) 5(2.4,-1.905) 6(2.4,-0.635) 7(2.4,0.635) 8(2.4,1.905)
  silkscreen extent -2.52,-2.5 0.9,2.88, body extent -2,-2.5 2,2.5, height 1.75
RVAR4 [mil]
  round 80 hole 40: 1(0,0) 2(98.43,-98.43)
  round 96 hole 52: 3(98.43,0)
  silkscreen extent -59,-157 256,157
SDR0604 [mm]
  oval 2.1x6 smd: 1(-2,0) 2(2,0)
  silkscreen extent -2.55,-2.5 2.55,2.5
SG-636 [mil]
  oval 83x50 smd: 1(0,0)
  rect 83x50 smd: 2(0,-200) 3(180,-200) 4(180,0)
  silkscreen extent -20,-310 200,110
TO-252#1 [mil]
  rect 30x100 smd: 1(-90,0) 2(0,0) 3(90,0) 4(0,350)
  TopLayer lines w60: -100,370 0,370 100,370
  silkscreen extent -130,70 130,370
TO-252#2 [mil]
  rect 30x100 smd: 1(-90,0) 2(0,0) 3(90,0) 4(0,350)
  TopLayer lines w60: -100,370 100,370
  silkscreen extent -130,70 130,370
TQFP144_N [mm] "Thin QFP, 144-Leads, Body 20x20mm, Pitch 0.5mm, IPC Medium Density"
  oval 1.8x0.3 smd: 1(-10.55,8.75) 2(-10.55,8.25) 3(-10.55,7.75) 4(-10.55,7.25) 5(-10.55,6.75) 6(-10.55,6.25) 7(-10.55,5.75) 8(-10.55,5.25) 9(-10.55,4.75) 10(-10.55,4.25) 11(-10.55,3.75) 12(-10.55,3.25) 13(-10.55,2.75) 14(-10.55,2.25) 15(-10.55,1.75) 16(-10.55,1.25) 17(-10.55,0.75) 18(-10.55,0.25) 19(-10.55,-0.25) 20(-10.55,-0.75) 21(-10.55,-1.25) 22(-10.55,-1.75) 23(-10.55,-2.25) 24(-10.55,-2.75) 25(-10.55,-3.25) 26(-10.55,-3.75) 27(-10.55,-4.25) 28(-10.55,-4.75) 29(-10.55,-5.25) 30(-10.55,-5.75) 31(-10.55,-6.25) 32(-10.55,-6.75) 33(-10.55,-7.25) 34(-10.55,-7.75) 35(-10.55,-8.25) 36(-10.55,-8.75) 73(10.55,-8.75) 74(10.55,-8.25) 75(10.55,-7.75) 76(10.55,-7.25) 77(10.55,-6.75) 78(10.55,-6.25) 79(10.55,-5.75) 80(10.55,-5.25) 81(10.55,-4.75) 82(10.55,-4.25) 83(10.55,-3.75) 84(10.55,-3.25) 85(10.55,-2.75) 86(10.55,-2.25) 87(10.55,-1.75) 88(10.55,-1.25) 89(10.55,-0.75) 90(10.55,-0.25) 91(10.55,0.25) 92(10.55,0.75) 93(10.55,1.25) 94(10.55,1.75) 95(10.55,2.25) 96(10.55,2.75) 97(10.55,3.25) 98(10.55,3.75) 99(10.55,4.25) 100(10.55,4.75) 101(10.55,5.25) 102(10.55,5.75) 103(10.55,6.25) 104(10.55,6.75) 105(10.55,7.25) 106(10.55,7.75) 107(10.55,8.25) 108(10.55,8.75)
  oval 0.3x1.8 smd: 37(-8.75,-10.55) 38(-8.25,-10.55) 39(-7.75,-10.55) 40(-7.25,-10.55) 41(-6.75,-10.55) 42(-6.25,-10.55) 43(-5.75,-10.55) 44(-5.25,-10.55) 45(-4.75,-10.55) 46(-4.25,-10.55) 47(-3.75,-10.55) 48(-3.25,-10.55) 49(-2.75,-10.55) 50(-2.25,-10.55) 51(-1.75,-10.55) 52(-1.25,-10.55) 53(-0.75,-10.55) 54(-0.25,-10.55) 55(0.25,-10.55) 56(0.75,-10.55) 57(1.25,-10.55) 58(1.75,-10.55) 59(2.25,-10.55) 60(2.75,-10.55) 61(3.25,-10.55) 62(3.75,-10.55) 63(4.25,-10.55) 64(4.75,-10.55) 65(5.25,-10.55) 66(5.75,-10.55) 67(6.25,-10.55) 68(6.75,-10.55) 69(7.25,-10.55) 70(7.75,-10.55) 71(8.25,-10.55) 72(8.75,-10.55) 109(8.75,10.55) 110(8.25,10.55) 111(7.75,10.55) 112(7.25,10.55) 113(6.75,10.55) 114(6.25,10.55) 115(5.75,10.55) 116(5.25,10.55) 117(4.75,10.55) 118(4.25,10.55) 119(3.75,10.55) 120(3.25,10.55) 121(2.75,10.55) 122(2.25,10.55) 123(1.75,10.55) 124(1.25,10.55) 125(0.75,10.55) 126(0.25,10.55) 127(-0.25,10.55) 128(-0.75,10.55) 129(-1.25,10.55) 130(-1.75,10.55) 131(-2.25,10.55) 132(-2.75,10.55) 133(-3.25,10.55) 134(-3.75,10.55) 135(-4.25,10.55) 136(-4.75,10.55) 137(-5.25,10.55) 138(-5.75,10.55) 139(-6.25,10.55) 140(-6.75,10.55) 141(-7.25,10.55) 142(-7.75,10.55) 143(-8.25,10.55) 144(-8.75,10.55)
  silkscreen extent -10.67,-9.25 9.25,9.57, body extent -10,-10 10,10, height 1.6

## Part data
C1_Conv_Ch1 C1_Conv_Ch2 C1_Conv_Ch3 C1_Conv_Ch4 C1_Conv_Ch5 C1_Conv_Ch6 C1_Conv_Ch7 C1_Conv_Ch8 C1_Conv_Ch9 C1_Conv_Ch10 C1_Conv_Ch11 C1_Conv_Ch12 C1_Conv_Ch13 C1_Conv_Ch14 C1_Conv_Ch15 C1_Conv_Ch16 C3_Conv_Ch1 C3_Conv_Ch2 C3_Conv_Ch3 C3_Conv_Ch4 C3_Conv_Ch5 C3_Conv_Ch6 C3_Conv_Ch7 C3_Conv_Ch8 C3_Conv_Ch9 C3_Conv_Ch10 C3_Conv_Ch11 C3_Conv_Ch12 C3_Conv_Ch13 C3_Conv_Ch14 C3_Conv_Ch15 C3_Conv_Ch16 C5_Conv_Ch1 C5_Conv_Ch2 C5_Conv_Ch3 C5_Conv_Ch4 C5_Conv_Ch5 C5_Conv_Ch6 C5_Conv_Ch7 C5_Conv_Ch8 C5_Conv_Ch9 C5_Conv_Ch10 C5_Conv_Ch11 C5_Conv_Ch12 C5_Conv_Ch13 C5_Conv_Ch14 C5_Conv_Ch15 C5_Conv_Ch16 CApu1 CApu2 CApu3 CApu4 CApu5 CApu6 CApu7 CApu8 CApu9 CApu10 CApu11 CApu12 CApu13 CApu14 CApu15 CApu16 Cgen Csup1 Csup4 Csup6 Csup8 Csup9 Csup10 Csup12 Csup14 Csup15 Csup17: library part C
C4_Conv_Ch1 C4_Conv_Ch2 C4_Conv_Ch3 C4_Conv_Ch4 C4_Conv_Ch5 C4_Conv_Ch6 C4_Conv_Ch7 C4_Conv_Ch8 C4_Conv_Ch9 C4_Conv_Ch10 C4_Conv_Ch11 C4_Conv_Ch12 C4_Conv_Ch13 C4_Conv_Ch14 C4_Conv_Ch15 C4_Conv_Ch16 Csup2 Csup3 Csup5 Csup7 Csup11 Csup13 Csup16: library part "C POL"
Lref1 Lref2 Lref3 Lref4: library part DR
R1_Conv_Ch1 R1_Conv_Ch2 R1_Conv_Ch3 R1_Conv_Ch4 R1_Conv_Ch5 R1_Conv_Ch6 R1_Conv_Ch7 R1_Conv_Ch8 R1_Conv_Ch9 R1_Conv_Ch10 R1_Conv_Ch11 R1_Conv_Ch12 R1_Conv_Ch13 R1_Conv_Ch14 R1_Conv_Ch15 R1_Conv_Ch16 R2_Conv_Ch1 R2_Conv_Ch2 R2_Conv_Ch3 R2_Conv_Ch4 R2_Conv_Ch5 R2_Conv_Ch6 R2_Conv_Ch7 R2_Conv_Ch8 R2_Conv_Ch9 R2_Conv_Ch10 R2_Conv_Ch11 R2_Conv_Ch12 R2_Conv_Ch13 R2_Conv_Ch14 R2_Conv_Ch15 R2_Conv_Ch16 RApu1 RApu2 RApu3 Rpu1 Rpu2 Rpu3 Rpu4: library part R
Rvar1_Conv_Ch1 Rvar1_Conv_Ch2 Rvar1_Conv_Ch3 Rvar1_Conv_Ch4 Rvar1_Conv_Ch5 Rvar1_Conv_Ch6 Rvar1_Conv_Ch7 Rvar1_Conv_Ch8 Rvar1_Conv_Ch9 Rvar1_Conv_Ch10 Rvar1_Conv_Ch11 Rvar1_Conv_Ch12 Rvar1_Conv_Ch13 Rvar1_Conv_Ch14 Rvar1_Conv_Ch15 Rvar1_Conv_Ch16: library part "R VAR"
SumIn_1 SumIn_2 SumIn_3 SumIn_4: library part "D Connector 9", "Receptacle Assembly, 9 Position, Right Angle"
SyncroClk TrigIN TrigOUT: library part COAX-F, "RF Coaxial PCB Connector, MCX; Thru-Hole, Right-Angle Mount Socket, Blunt Post Terminal, 50 Ohm Impedance"
U3_Conv_Ch1 U3_Conv_Ch2 U3_Conv_Ch3 U3_Conv_Ch4 U3_Conv_Ch5 U3_Conv_Ch6 U3_Conv_Ch7 U3_Conv_Ch8 U3_Conv_Ch9 U3_Conv_Ch10 U3_Conv_Ch11 U3_Conv_Ch12 U3_Conv_Ch13 U3_Conv_Ch14 U3_Conv_Ch15 U3_Conv_Ch16: "Single Ultra-High-Speed, +3V/+5V, Beyond-the-Rails Comparator"
UApu1: "Cyclone Family, 1.5V FPGA, 104 I/O Pins, 1 x PLL, Commercial Grade, Speed Grade 8"
UApu2: "Serial configuration device for Cyclone (Altera)"
UApu4 UApu5: "Octal Bus Transceiver with 3-State Outputs"
UApu6 UApu7 UApu8 UApu9 UApu10: "Octal Buffer and Line Driver with 3-State Outputs"
UG1: library part SG-636, "Crystal Oscillator (SMD)"
Usup2: library part NCP1117-3.3V
VME-BUS/J1: library part VME-P1/J1
VME-BUS/J2: library part CNVME96, "96-Pin Connector (3x32 2.54mm grid)"

## Free pads (board coordinates)
  round 40 / inner round 0 / far side round 40 all layers, no hole: 1(13737,11950) 2(13737,6350)
  round 40 all layers, no hole: 2(13736,6350)
  round 0 hole 32: 3(13187,11975) 6(13187,11825) 7(13187,9225) 10(13187,9075) 11(13187,6475) 14(13187,6325)
  round 0 hole 20: 4(13177,11925) 5(13177,11875) 8(13177,9175) 9(13177,9125) 12(13177,6425) 13(13177,6375)
  round 181.1 hole 137.79: 15(13737,12100) 16(13737,6200) 17(12967,12159) 20(4217,12159)

## Via types
v1: diameter 36, hole 24, TopLayer to BottomLayer, 142 vias
v2: diameter 46, hole 32, TopLayer to BottomLayer, 64 vias
v3: diameter 50, hole 28, TopLayer to BottomLayer, 53 vias
v4: diameter 80, hole 48, TopLayer to BottomLayer, 27 vias
v5: diameter 56, hole 32, TopLayer to BottomLayer, 25 vias
v6: diameter 40, hole 24, TopLayer to BottomLayer, 18 vias
v7: diameter 64, hole 40, TopLayer to BottomLayer, 8 vias
v8: diameter 42, hole 28, TopLayer to BottomLayer, 2 vias
v9: diameter 54, hole 36, TopLayer to BottomLayer, 1 vias

## Nets (pads, with @x,y where several pads share a name; then routed paths per layer and width w, separated by ;. In a path a pad name is that pad's centre, name@x,y a point inside that pad or via, vN(x,y) a via of type N, cw(c..) or ccw(c..) an arc to the next point about the centre after c; other vN are vias at no path point)
"+1.5 VDIG": CApu10.2 CApu11.2 CApu12.2 CApu13.2 CApu14.2 Csup11.+ Csup12.1 UApu1.15 UApu1.46 UApu1.64 UApu1.117 UApu1.135 Usup2.2 Usup2.4 | length 3822.3
  TopLayer w8: UApu1.15@8448.94,8284.92 v3@8566.08,8284.92 ; UApu1.46@8696.97,7800.67 8696.97,7850.67 v6(8724.47,7878.17) ; UApu1.135@8696.97,8631.38 8696.97,8573.35 v6(8719.29,8551.02) ; v6(9019.29,8551.02) 9051.3,8583.03 UApu1.117@9051.3,8631.38 ; v6(9029.29,7881.02) 9051.3,7859.02 UApu1.64@9051.3,7800.67
  TopLayer w40: Usup2.2@8220,6770 Csup12.1@8220,7243 ; Usup2.4@8220,7140 v3(8350,7140) Csup11.+@8485,7140
  MidLayer1 w40: v3(8350,7140) 8835,7625 8835,7686.73 ; v3(8576,8275) v3@8589.22,8275 ; v6(9019.29,8551.02) 8988.27,8520 8750.31,8520 v6(8719.29,8551.02) 8658.27,8490 8625,8490 8590,8455 8590,7975 8615,7950 8652.64,7950 v6(8724.47,7878.17) 8835,7767.64 8835,7686.73 ; v6(9029.29,7881.02) 8835,7686.73
  BottomLayer w12: CApu14.2@8505,8257.2 8527.2,8257.2 8545,8275 v3(8576,8275) ; v6(8719.29,8551.02) CApu11.2@8719.29,8586.02 ; CApu13.2@8724.47,7843.17 v6(8724.47,7878.17) ; CApu12.2@9029.29,7846.02 v6(9029.29,7881.02)